# Altium PCB PayLoad Subsystem_AVR.PcbDoc
Units mil, origin at the board's own origin, x right, y up, seen from the top; angles counter-clockwise.
Board outline 3757.87 x 3555.12 mil, 4 copper layers (Top Layer, Ground, Power, Bottom Layer), stack 64.6 mil thick; 26 components, 28 nets, 176 pads, 0 vias.
Unrouted connection lines stored in the file: 61.
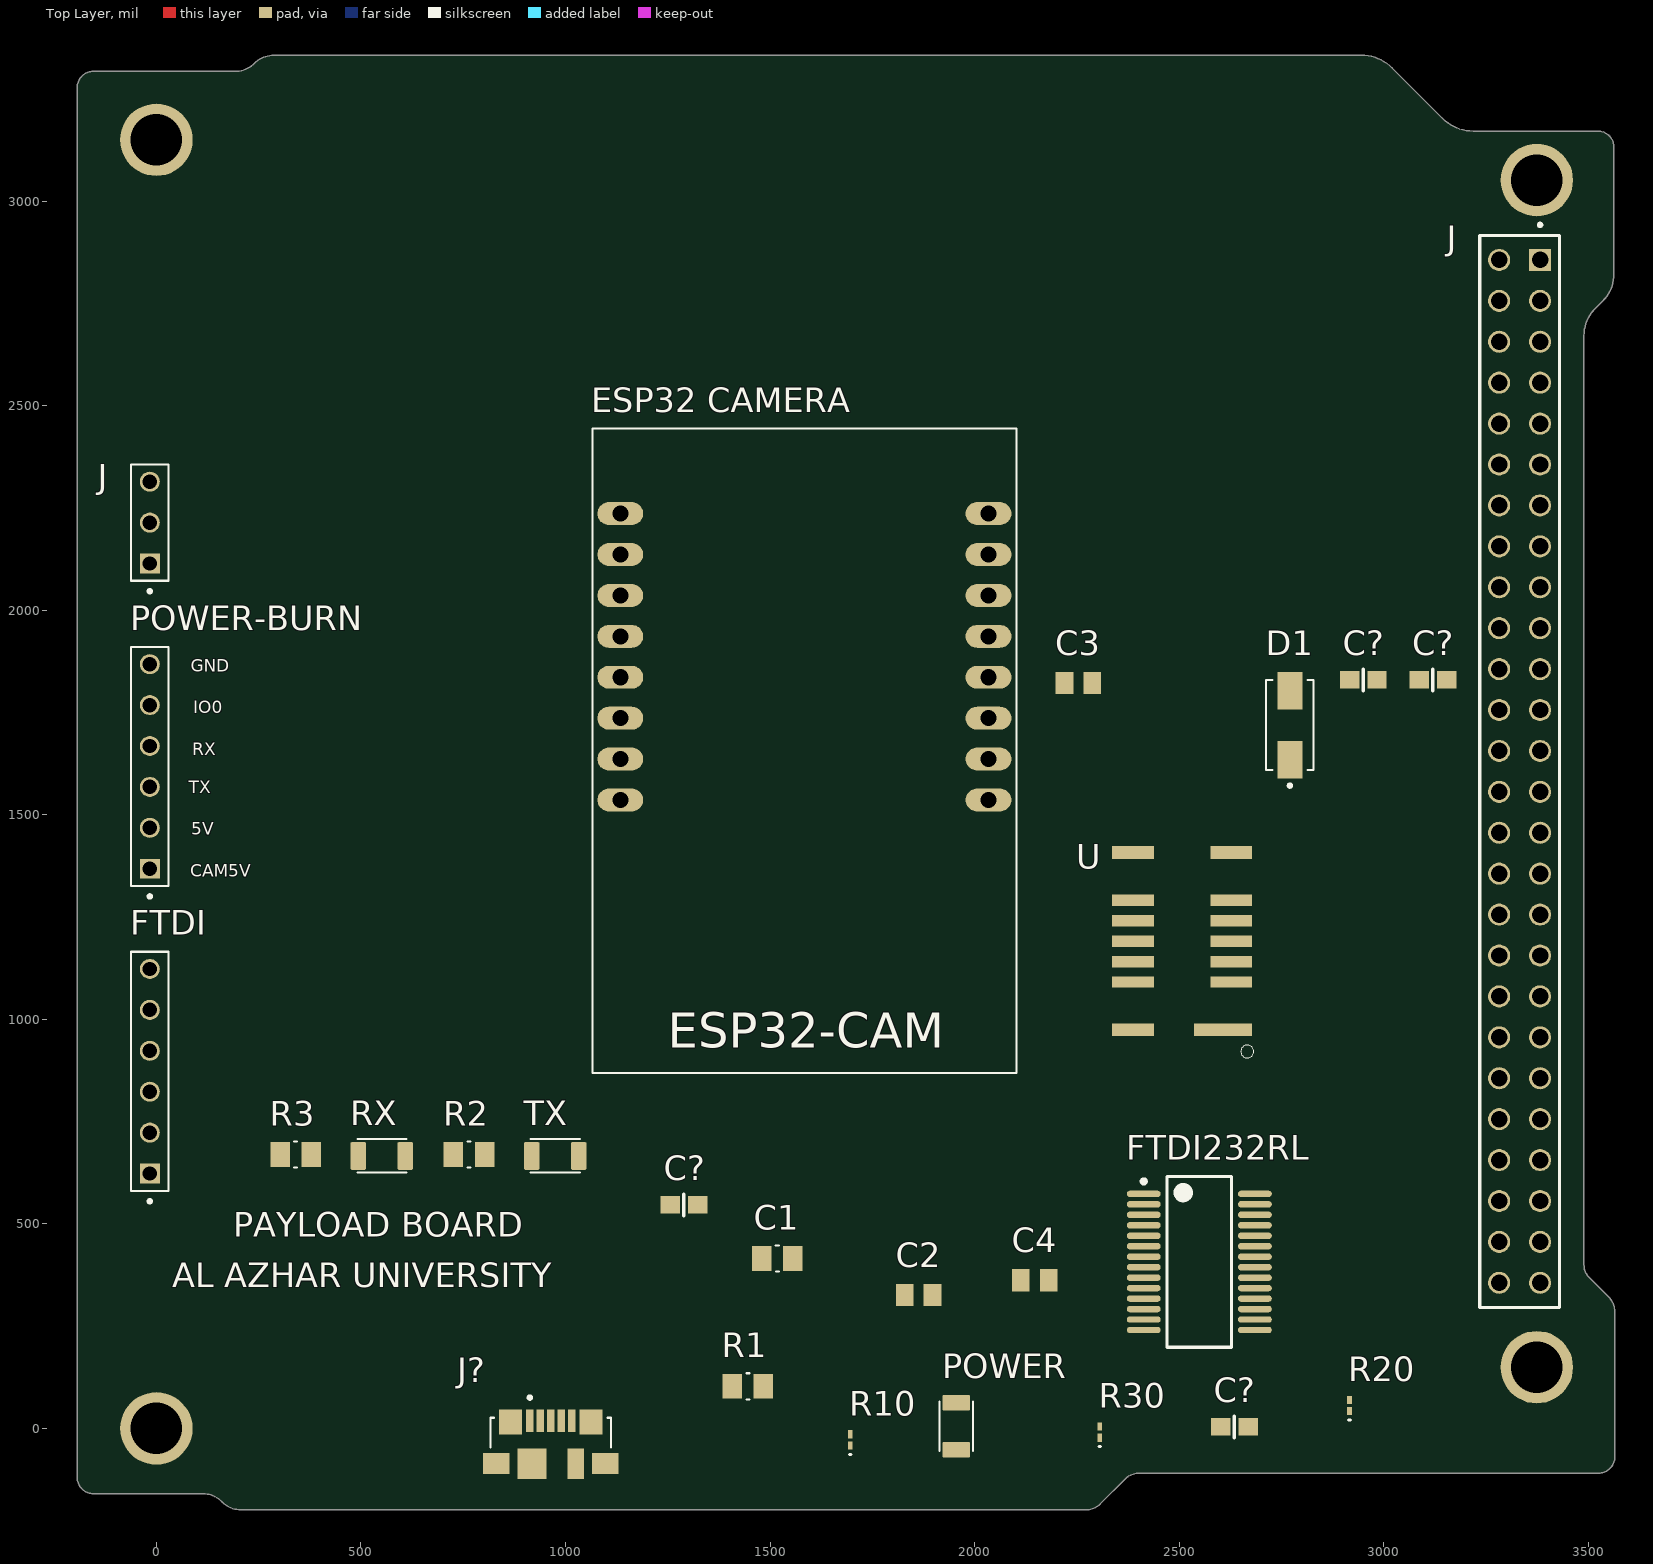
[diagram p0: Top Layer view]
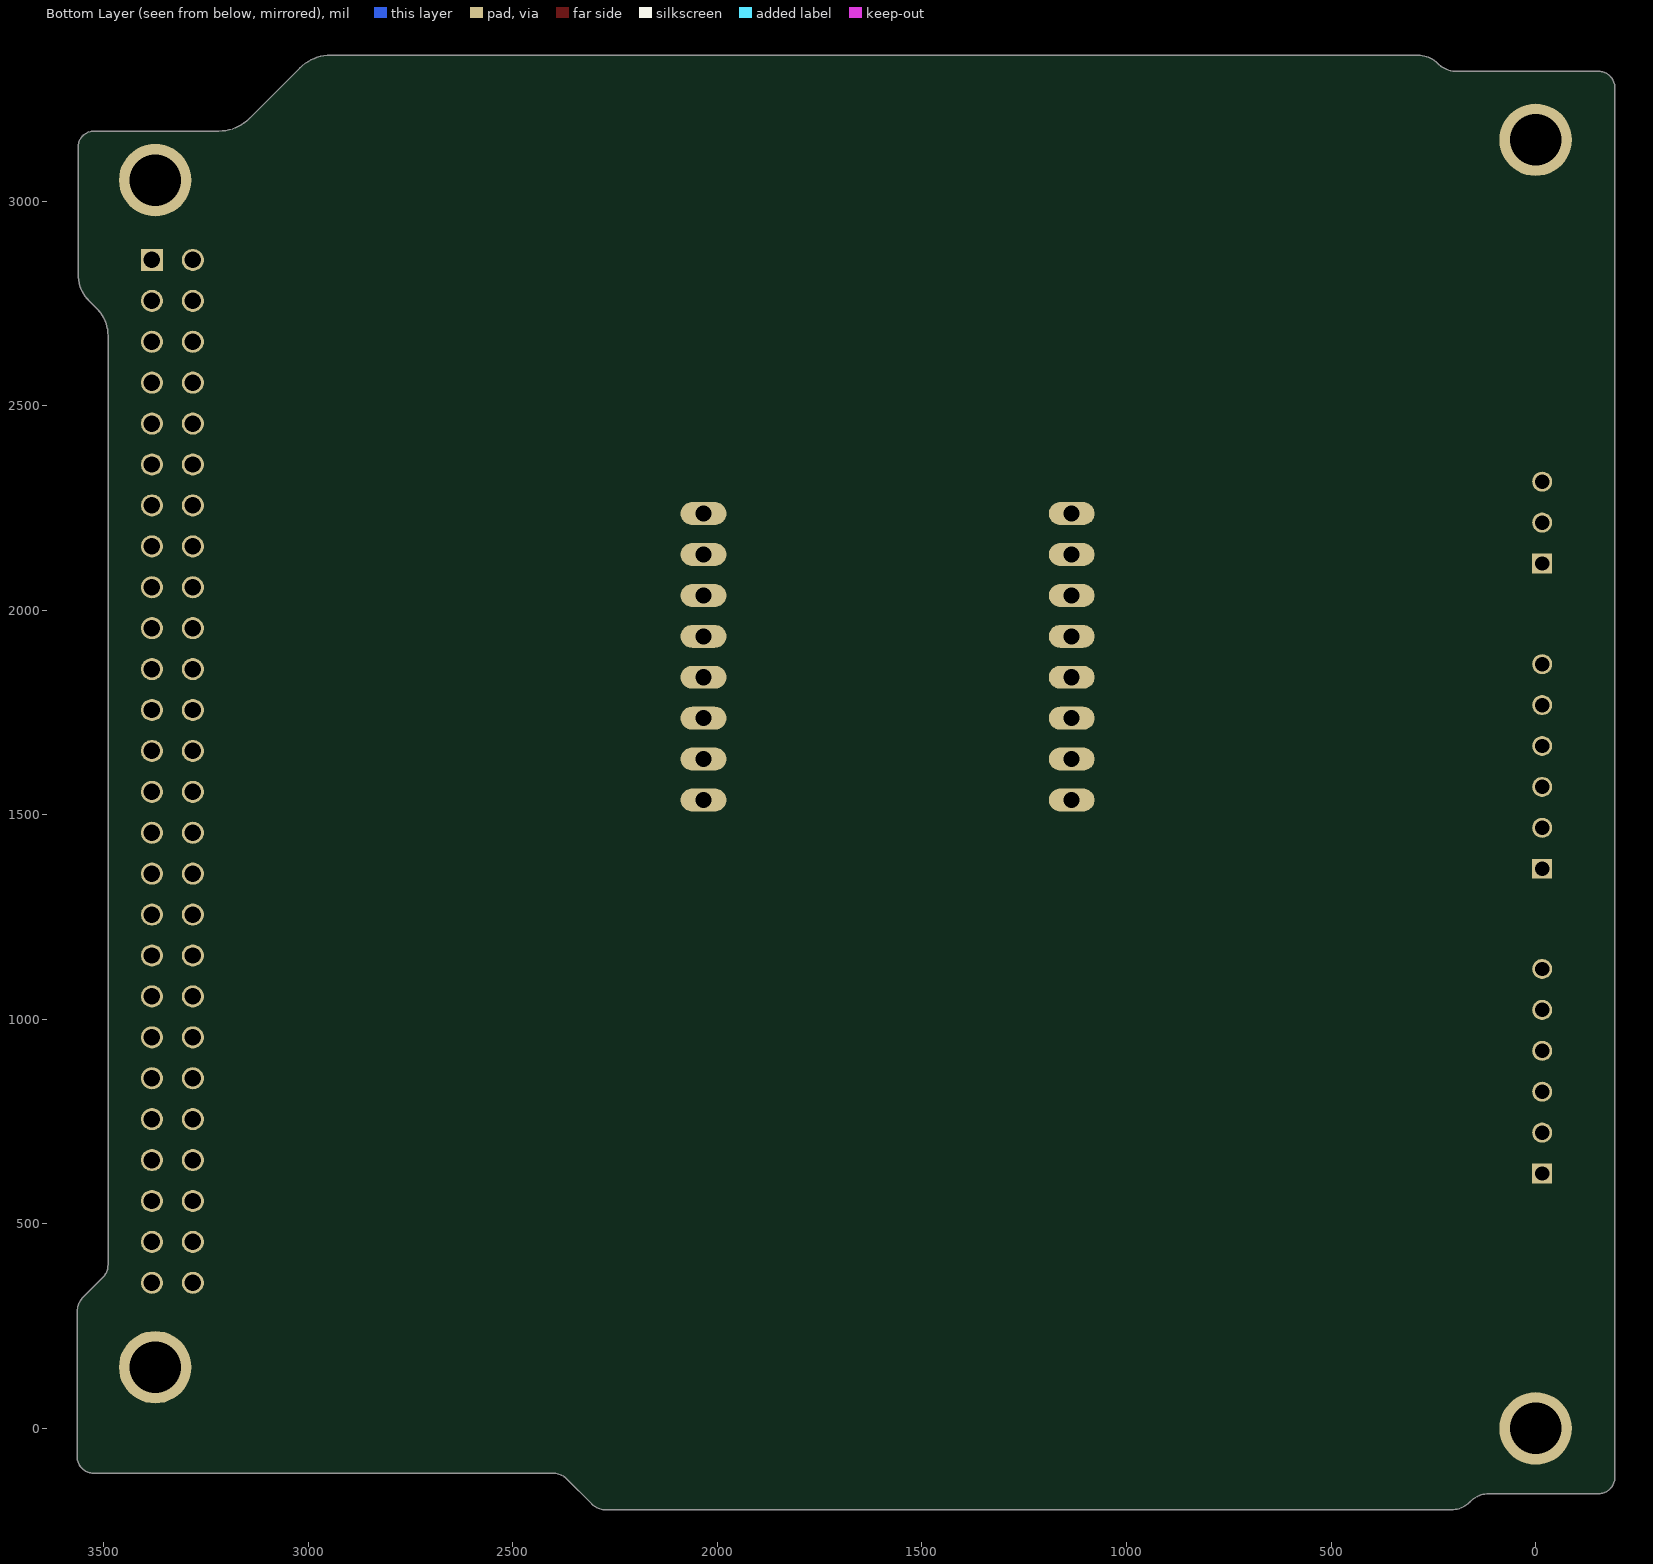
[diagram p1: Bottom Layer view, seen from below]
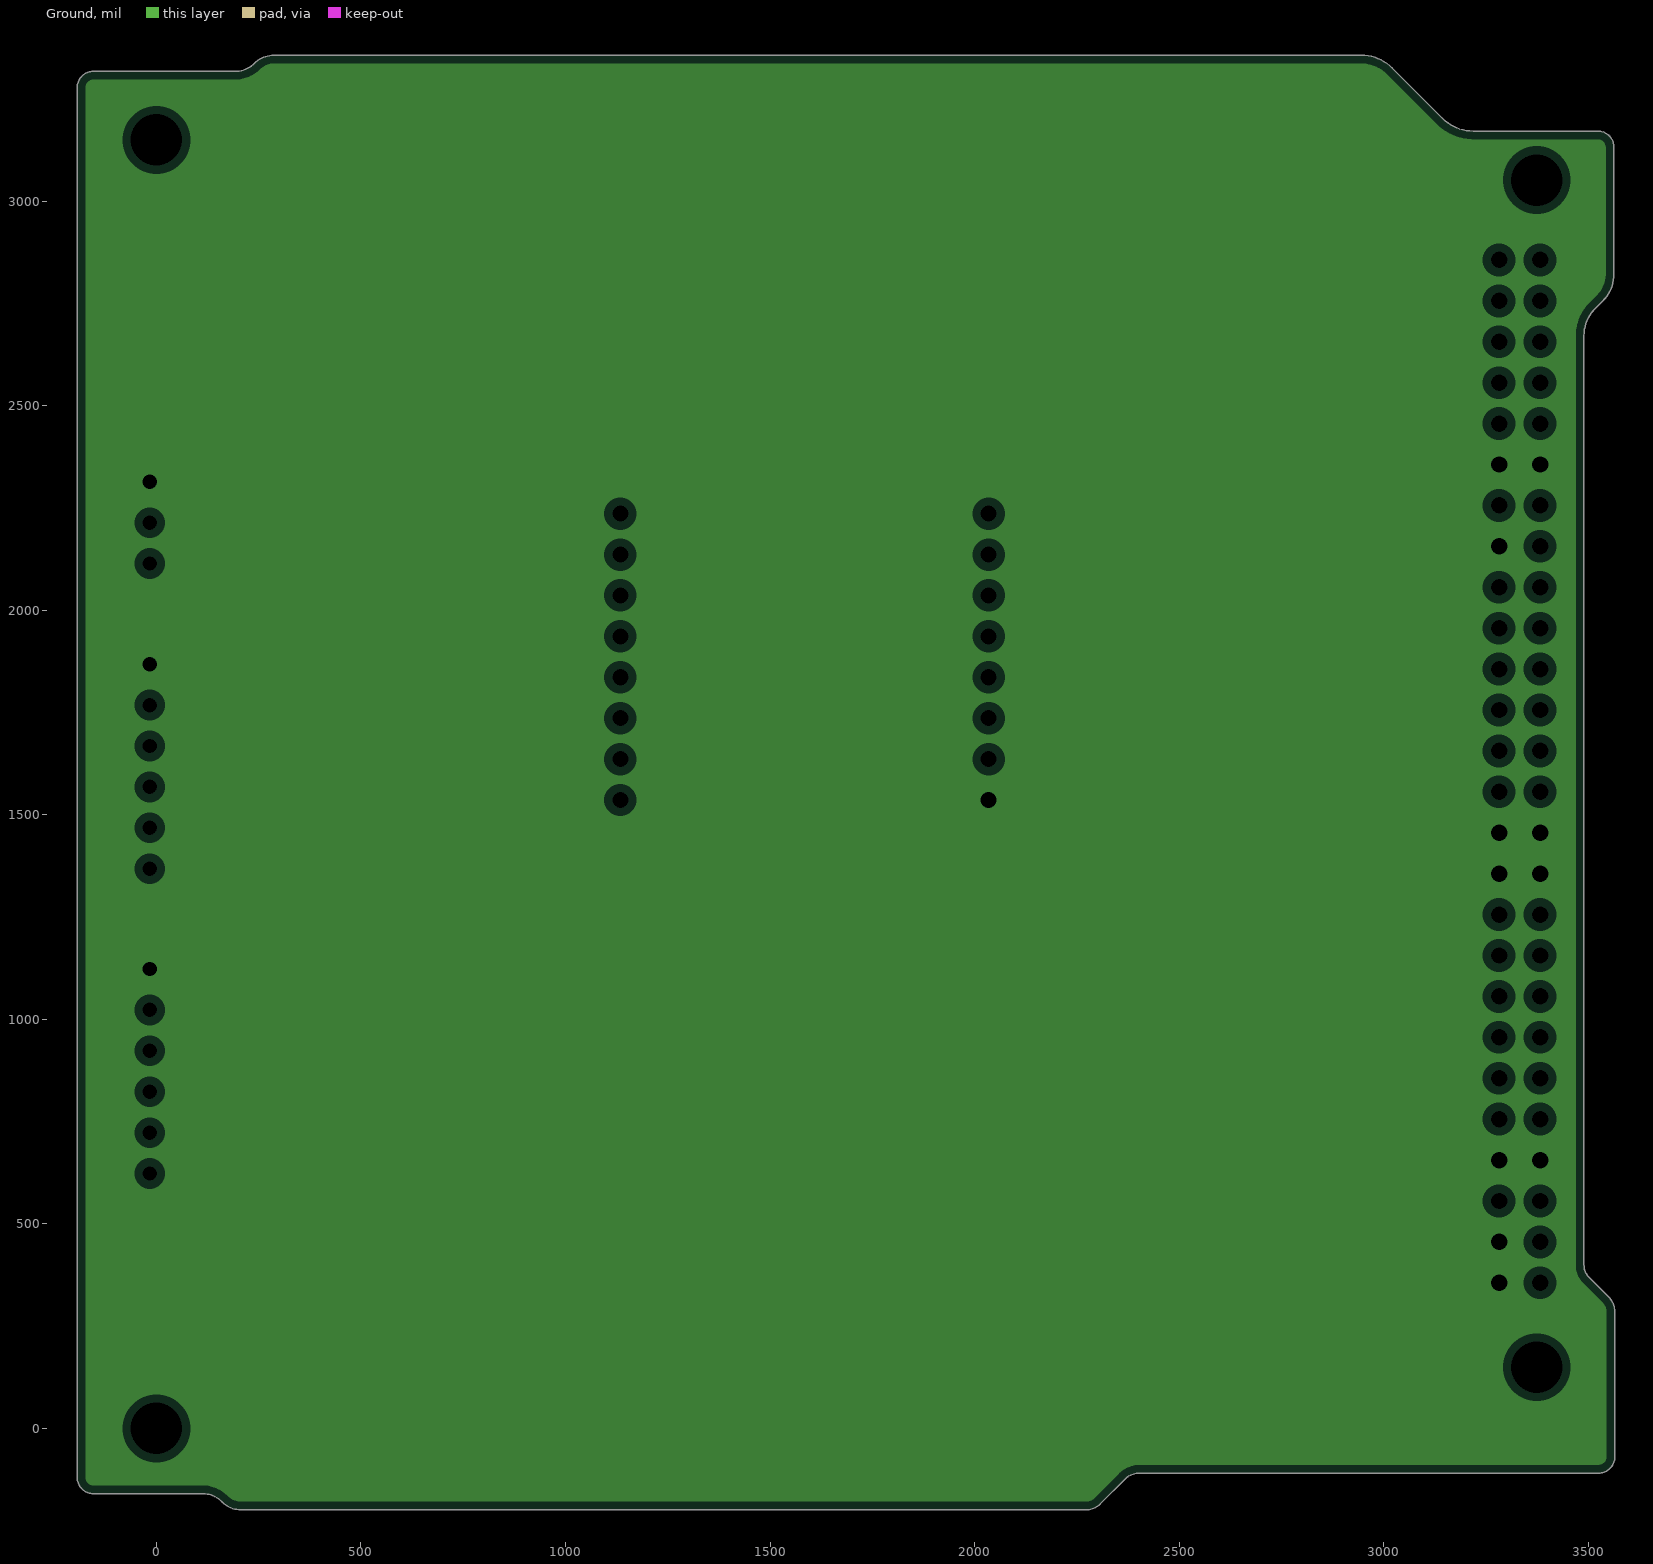
[diagram p2: Ground, clearances drawn from the general rule]
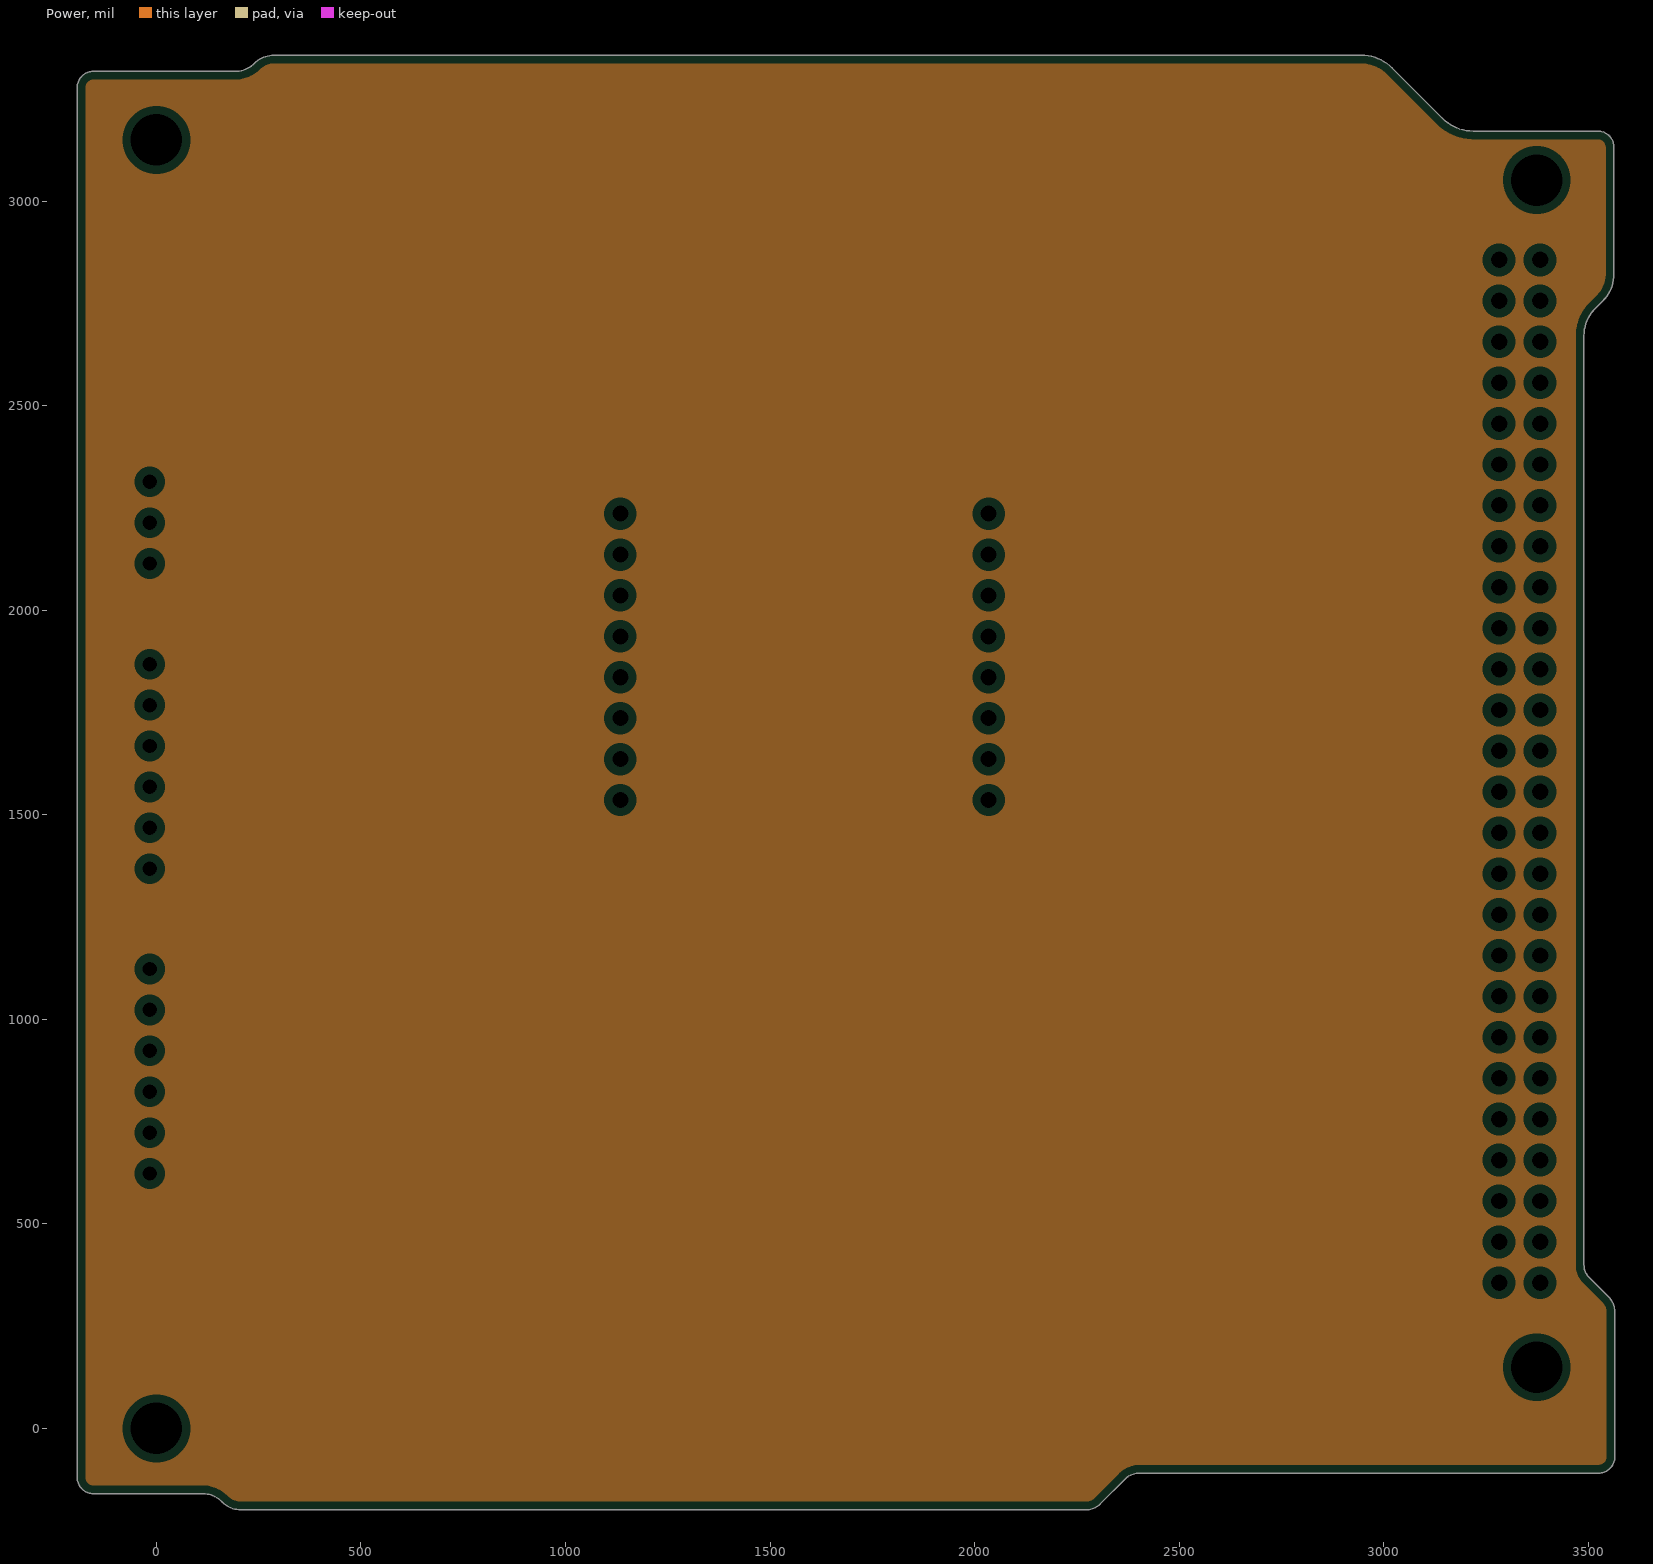
[diagram p3: Power, clearances drawn from the general rule]

## Layer stack, top to bottom
Top Solder: solder mask 0.4, Solder Resist, Dk 3.5
Top Layer: signal copper 1.4
Dielectric 1: prepreg 6.7, FR-4, Dk 4.35
Ground: plane copper 0.7, net G
Dielectric 3: core 47, FR-4, Dk 4.35
Power: plane copper 0.7
Dielectric 2: prepreg 6.7, FR-4, Dk 4.35
Bottom Layer: signal copper 1.4
Bottom Solder: solder mask 0.4, Solder Resist, Dk 3.5

## Board outline
114.17,-159.45 cw(c114.17,-223.13) 159.2,-178.1 161.27,-180.17 ccw(c206.3,-135.14) 206.3,-198.82 2272.83,-198.82 ccw(c2272.83,-150.82) 2306.78,-184.76 2368.42,-123.11 cw(c2402.36,-157.05) 2402.36,-109.06 3525.2,-109.06 ccw(c3525.2,-69.68) 3564.57,-69.68 3564.57,285.43 ccw(c3513.72,285.43) 3549.67,321.39 3528.54,342.52 3502.04,369.03 cw(c3532.62,399.61) 3489.37,399.61 3489.37,2671.26 cw(c3582.52,2671.26) 3516.65,2737.12 3535.32,2755.79 ccw(c3469.45,2821.65) 3562.6,2821.65 3562.6,3131.5 ccw(c3523.23,3131.5) 3523.23,3170.87 3218.5,3170.87 cw(c3218.5,3276.37) 3143.9,3201.77 3020.27,3325.4 ccw(c2945.67,3250.8) 2945.67,3356.3 287.48,3356.3 ccw(c287.48,3289.09) 239.96,3336.61 cw(c192.44,3384.14) 192.44,3316.93 -153.94,3316.93 ccw(c-153.94,3277.56) -193.31,3277.56 -193.31,-120.08 ccw(c-153.94,-120.08) -153.94,-159.45

## Design rules (kind name [scope] priority, off if disabled: settings)
Clearance [All] p1: gap=7 ignorepadtopadclearanceinfootprint=FALSE except(0: Arc-Hole Track-Hole SMDPad-Hole THPad-Hole Via-Hole Fill-Hole Poly-Hole Region-Hole Text-Hole)
ComponentClearance [All] p1: gap=30 collisioncheckmode=3 verticalgap=30 showdistances=FALSE
DiffPairsRouting [All] p1: maxlimit=10 minlimit=10 mostfreqgap=10 toplayer_minwidth=15 toplayer_maxwidth=15 toplayer_prefwidth=15 bottomlayer_minwidth=15 bottomlayer_maxwidth=15 bottomlayer_prefwidth=15 substack1={0761D619-B0FF-4D42-81BD-1B94FE1A46B2} toplayer_{0761d619-b0ff-4d42-81bd-1b94fe1a46b2}_minwidth=15 toplayer_{0761d619-b0ff-4d42-81bd-1b94fe1a46b2}_maxwidth=15 toplayer_{0761d619-b0ff-4d42-81bd-1b94fe1a46b2}_prefwidth=15 bottomlayer_{0761d619-b0ff-4d42-81bd-1b94fe1a46b2}_minwidth=15 bottomlayer_{0761d619-b0ff-4d42-81bd-1b94fe1a46b2}_maxwidth=15 bottomlayer_{0761d619-b0ff-4d42-81bd-1b94fe1a46b2}_prefwidth=15 maxuncoupledlength=500
HoleSize [All] p1: absolutevalues=TRUE maxlimit=130 minlimit=1 maxpercent=80.000 minpercent=20.000
MinimumSolderMaskSliver [All] p1: minsoldermaskwidth=3
PlaneClearance [All] p1: clearance=20
PlaneConnect [All] p1: planeconnectstyle=Relief reliefexpansion=20 reliefentries=4 reliefconductorwidth=10 reliefairgap=10
PolygonConnect [All] p1: connectstyle=Relief reliefconductorwidth=10 reliefentries=4 polygonreliefangle="90 Angle" airgapwidth=10
RoutingVias [All] p1: holewidth=12 width=24 viastyle="Through Hole" minholewidth=10 minwidth=10 maxholewidth=12 maxwidth=24
SilkToSilkClearance [All] p1: silktosilkclearance=4
SilkToSolderMaskClearance [IsText] p1: minsilkscreentomaskgap=4 clearancetoexposedcopper=TRUE
SolderMaskExpansion [All] p1: expansion=3 istentingtop=FALSE
Width [All] p1: maxlimit=40 minlimit=10 preferedwidth=12 substack1={0761D619-B0FF-4D42-81BD-1B94FE1A46B2} toplayer_{0761d619-b0ff-4d42-81bd-1b94fe1a46b2}_minwidth=7 bottomlayer_{0761d619-b0ff-4d42-81bd-1b94fe1a46b2}_minwidth=7 minimp=50.000000 maximp=50.000000 favimp=50.000000
22 further rules are at their usual default settings.

## Classes and differential pairs
component class "PayLoad Subsystem_AVR": C1 C2 C3 C4 C? D1 "ESP32 CAM" "ESP32 CAMERA" FTDI FTDI232RL J J? POWER POWER-BURN R1 R2 R3 R10 R20 R30 RX TX U

## Components (designator, comment, footprint, x,y, rotation, side; value= is the part's Value field where it differs from the comment)
C1 "(1206) 10uF" CAPC3216X125N0 1516.98,417 r0 top
C2 "(0805) 100nF" CAPC2012X95N-0 1863,326 r0 top
C3 "(0805) 10nF" CAPC2012X95N-0 2253.69,1822.18 r0 top
C4 "(0805) 100nF" CAPC2012X95N-0 2147,362 r0 top
C? "Cap_CER_1U_10V_0603" "0603 - cap" 2601.69,4.18 r0 top
C? "Cap_CER_1U_10V_0603" "0603 - cap" 1256,547 r0 top
C? "Cap_CER_1U_10V_0603" "0603 - cap" 3086.69,1830.18 r0 top
C? "Cap_CER_1U_10V_0603" "0603 - cap" 2916.69,1830.18 r0 top
D1 "SMD Schottky diode 5A/40V" DIOM5227X270N 2770.69,1719.18 r90 top
"ESP32 CAMERA" "ESP32-CAM" ESP32-CAM 1584,1836 r0 top
FTDI "6 Position PinHeader 1Row" TE_6-146285-6 -16,623 r90 top
FTDI232RL "IC_FT232RL" SSOP-28 2549.17,406.98 r0 top
J "3 Position PinHeader 1Row" TE_3-103327-3 -16,2114 r90 top
J "52 Position Elevated Socket Connector" SAMTEC_ESQ-126-39-G-D 3382.01,2855.98 r90 top locked
J? "USB Connectors MICRO USB B" MOLEX_47346-0001 963.98,-86 r0 top
POWER "(1206) Blue" RESC3015X65-01 1955,6 r90 top
POWER-BURN "6 Position PinHeader 1Row" TE_6-146285-6 -16,1368 r90 top
R1 "(1206) 85" CAPC3216X125N0 1445,105 r0 top
R2 "(1206) 150" CAPC3216X125N0 763.69,671.18 r0 top
R3 "(1206) 150" CAPC3216X125N0 339.69,671.18 r0 top
R10 "RES_0_0.1W_0603" 0603 1696,-28 r90 top
R20 "RES_0_0.1W_0603" 0603 2916,56 r90 top
R30 "RES_0_0.1W_0603" 0603 2306,-9 r90 top
RX "(1206) Yellow" RESC3015X65-01 551.69,666.18 r0 top
TX "(1206) Green" RESC3015X65-01 975.69,666.18 r0 top
U "Infrared camera AMG8833" XDCR_AMG8833 2507.08,1191 r90 top

## Footprints (in the part's own frame and the unit in brackets; to place one, negate y for a bottom-side part, rotate by r counter-clockwise, add the part's x,y. Pads: shape width x height; smd on the part's side, far side on the other; paste and mask are expansions set on the pad)
0603 [mm]
  rect 0.5x0.3 smd: 1(-0.35,0) 2(0.35,0)
  silkscreen extent -0.9,-0.05 -0.9,0.05, body extent -0.33,-0.18 0.33,0.18, height 0.55
"0603 - cap" [mm]
  rect 1.2x1.1 smd: 1(0,0) 2(1.7,0)
  silkscreen extent 0.84,-0.69 0.84,0.66, body extent 0.04,-0.43 1.64,0.37, height 0.8
CAPC2012X95N-0 [mm]
  rect 1.1x1.38 smd: 1(-0.863,0) 2(0.863,0)
  body extent -1.6,-0.8 1.6,0.8, height 1.2
CAPC3216X125N0 [mm]
  rect 1.21x1.55 smd: 1(-0.95,-0.047) 2(0.987,-0.047)
  silkscreen extent -0.08,-0.86 0.12,0.76, body extent -1.58,-0.84 1.62,0.76, height 1.25
DIOM5227X270N [mm]
  rect 2.33x1.56 smd: A(2.14,0) C(-2.14,0)
  silkscreen extent -3.85,-1.48 2.8,1.48, body extent -2.6,-1.36 2.6,1.36, height 2.7
ESP32-CAM [mil]
  oval 112x56 hole 39.37: P$1(-450,400) P$2(-450,300) P$3(-450,200) P$4(-450,100) P$5(-450,0) P$6(-450,-100) P$7(-450,-200) P$8(-450,-300) P$9(450,-300) P$10(450,-200) P$11(450,-100) P$12(450,0) P$13(450,100) P$14(450,200) P$15(450,300) P$16(450,400)
  silkscreen extent -518,-967 518,607, body extent -531,-918 531,618, height 315
MOLEX_47346-0001 [mm]
  rect 0.45x1.38 smd: 1(-1.3,2.66) 2(-0.65,2.66) 3(0,2.66) 4(0.65,2.66) 5(1.3,2.66)
  rect 1.425x1.55 smd: S1(-2.488,2.575) S2(2.488,2.575)
  rect 1.65x1.3 smd: S3(-3.375,0) S6(3.375,0)
  rect 1.8x1.9 smd: S4(-1.15,0)
  rect 1x1.9 smd: S5(1.55,0)
  silkscreen extent -3.75,1 3.75,4.2, body extent -4.18,-2.54 4.18,2.89, height 2.62
RESC3015X65-01 [mm]
  rrect20% 0.98x1.72 smd: 1(-1.479,-0.004) 2(1.441,-0.004)
  silkscreen extent -1.54,-1.04 1.52,1.04, body extent -1.63,-0.8 1.57,0.8, height 1.1
SAMTEC_ESQ-126-39-G-D [mm]
  rect 1.37x1.37 hole 1.02: 01(0,0)
  round 1.37 hole 1.02: 02(0,2.54) 03(-2.54,0) 04(-2.54,2.54) 05(-5.08,0) 06(-5.08,2.54) 07(-7.62,0) 08(-7.62,2.54) 09(-10.16,0) 10(-10.16,2.54) 11(-12.7,0) 12(-12.7,2.54) 13(-15.24,0) 14(-15.24,2.54) 15(-17.78,0) 16(-17.78,2.54) 17(-20.32,0) 18(-20.32,2.54) 19(-22.86,0) 20(-22.86,2.54) 21(-25.4,0) 22(-25.4,2.54) 23(-27.94,0) 24(-27.94,2.54) 25(-30.48,0) 26(-30.48,2.54) 27(-33.02,0) 28(-33.02,2.54) 29(-35.56,0) 30(-35.56,2.54) 31(-38.1,0) 32(-38.1,2.54) 33(-40.64,0) 34(-40.64,2.54) 35(-43.18,0) 36(-43.18,2.54) 37(-45.72,0) 38(-45.72,2.54) 39(-48.26,0) 40(-48.26,2.54) 41(-50.8,0) 42(-50.8,2.54) 43(-53.34,0) 44(-53.34,2.54) 45(-55.88,0) 46(-55.88,2.54) 47(-58.42,0) 48(-58.42,2.54) 49(-60.96,0) 50(-60.96,2.54) 51(-63.5,0) 52(-63.5,2.54)
  silkscreen extent -65.03,-1.2 2.27,3.74, body extent -65.15,-1.27 1.4,3.81, height 8.51
SSOP-28 [mm] "28-Pin SSOP 0.65 mm Pitch"
  oval 2.1x0.4 smd: 1(-3.45,4.225) 2(-3.45,3.575) 3(-3.45,2.925) 4(-3.45,2.275) 5(-3.45,1.625) 6(-3.45,0.975) 7(-3.45,0.325) 8(-3.45,-0.325) 9(-3.45,-0.975) 10(-3.45,-1.625) 11(-3.45,-2.275) 12(-3.45,-2.925) 13(-3.45,-3.575) 14(-3.45,-4.225) 15(3.45,-4.225) 16(3.45,-3.575) 17(3.45,-2.925) 18(3.45,-2.275) 19(3.45,-1.625) 20(3.45,-0.975) 21(3.45,-0.325) 22(3.45,0.325) 23(3.45,0.975) 24(3.45,1.625) 25(3.45,2.275) 26(3.45,2.925) 27(3.45,3.575) 28(3.45,4.225)
  silkscreen extent -3.57,-5.3 2,5.3, body extent -2.7,-5.3 2.7,5.3, height 2
TE_3-103327-3 [mm]
  rect 1.24x1.24 hole 0.89: 1(0,0)
  round 1.24 hole 0.89: 2(2.54,0) 3(5.08,0)
  silkscreen extent -1.82,-1.17 6.15,1.17, body extent -1.31,-1.2 6.31,1.21, height 8.18
TE_6-146285-6 [mm]
  rect 1.24x1.24 hole 0.89: 1(0,0)
  round 1.24 hole 0.89: 2(2.54,0) 3(5.08,0) 4(7.62,0) 5(10.16,0) 6(12.7,0)
  silkscreen extent -1.82,-1.17 13.77,1.17, body extent -1.07,-1.14 13.77,1.14, height 8.1
XDCR_AMG8833 [mm]
  rect 0.8x3.6 smd: 1(-5.5,-2.55)
  rect 0.7x2.6 smd: 2(-2.54,-3.05) 3(-1.27,-3.05) 4(0,-3.05) 5(1.27,-3.05) 6(2.54,-3.05) 9(2.54,3.05) 10(1.27,3.05) 11(0,3.05) 12(-1.27,3.05) 13(-2.54,3.05)
  rect 0.8x2.6 smd: 7(5.5,-3.05) 8(5.5,3.05) 14(-5.5,3.05)
  silkscreen extent -7.25,-4.45 -6.45,-3.65, body extent -5.8,-4 5.8,4, height 4.3

## Part data
C1: library part "Capacitor 1206", "UMF316B7103KFHT/1206 Capacitor", Package=None, Availability=Unavailable, MP=UMF316B7103KFHT, Price=None
C2 C3 C4: library part "Capacitor 0805", "UMK212SD103KD-T/CAP CER 10000PF 50V 0805", Package=None, Availability=Unavailable, MP=UMK212SD103KD-T, Price=None
C?: library part "Capacitor 0603", "Capacitor", Capacitance=1µF, Manufacturer="Taiyo Yuden", Manufacturer Part Number=LMK107B7105KA-T, Operating Temperature="-55°C ~ 125°C", Package / Case="0603 (1608 Metric)", Ratings=-, Supplier Part Number 1=587-1242-1-ND, Temperature Coefficient=X7R, Tolerance=±10%, Voltage - Rated=10V, Applications="General Purpose", Category=Capacitors, ComponentLink1Description=http://ds.yuden.co.jp/TYCOMPAS/ut/detail.do?productNo=LMK107B7105KA-T&fileName=LMK107B7105KA-T_SS&mode=specSheetDownload, ComponentLink1URL=http://ds.yuden.co.jp/TYCOMPAS/ut/detail.do?productNo=LMK107B7105KA-T&fileName=LMK107B7105KA-T_SS&mode=specSheetDownload, Features=-, Height - Seated (Max)=-, Lead Spacing=-, Lead Style=-, Mounting Type="Surface Mount, MLCC", Packaging="Cut Tape (CT)", Part Status=Active, Pricing 1="1=0.1, 10=0.042, 25=0.0308, 50=0.023, 100=0.0188, 250=0.01576, 500=0.01344, 1000=0.01056 (USD)", RoHS="RoHS Compliant", Size / Dimension="0.063\" L x 0.031\" W (1.60mm x 0.80mm)", Stock 1=600713, Supplier 1=Digi-Key, Thickness (Max)="0.035\" (0.90mm)"
C?: library part "Capacitor 0603", "Capacitor", Capacitance=2.2µF, Manufacturer="Taiyo Yuden", Manufacturer Part Number=LMK107B7105KA-T, Operating Temperature="-55°C ~ 125°C", Package / Case="0603 (1608 Metric)", Ratings=-, Supplier Part Number 1=587-1242-1-ND, Temperature Coefficient=X7R, Tolerance=±10%, Voltage - Rated=10V, Applications="General Purpose", Category=Capacitors, ComponentLink1Description=http://ds.yuden.co.jp/TYCOMPAS/ut/detail.do?productNo=LMK107B7105KA-T&fileName=LMK107B7105KA-T_SS&mode=specSheetDownload, ComponentLink1URL=http://ds.yuden.co.jp/TYCOMPAS/ut/detail.do?productNo=LMK107B7105KA-T&fileName=LMK107B7105KA-T_SS&mode=specSheetDownload, Features=-, Height - Seated (Max)=-, Lead Spacing=-, Lead Style=-, Mounting Type="Surface Mount, MLCC", Packaging="Cut Tape (CT)", Part Status=Active, Pricing 1="1=0.1, 10=0.042, 25=0.0308, 50=0.023, 100=0.0188, 250=0.01576, 500=0.01344, 1000=0.01056 (USD)", RoHS="RoHS Compliant", Size / Dimension="0.063\" L x 0.031\" W (1.60mm x 0.80mm)", Stock 1=600713, Supplier 1=Digi-Key, Thickness (Max)="0.035\" (0.90mm)"
C?: library part "Capacitor 0603", "Capacitor", Capacitance=100nF, Manufacturer="Taiyo Yuden", Manufacturer Part Number=LMK107B7105KA-T, Operating Temperature="-55°C ~ 125°C", Package / Case="0603 (1608 Metric)", Ratings=-, Supplier Part Number 1=587-1242-1-ND, Temperature Coefficient=X7R, Tolerance=±10%, Voltage - Rated=10V, Applications="General Purpose", Category=Capacitors, ComponentLink1Description=http://ds.yuden.co.jp/TYCOMPAS/ut/detail.do?productNo=LMK107B7105KA-T&fileName=LMK107B7105KA-T_SS&mode=specSheetDownload, ComponentLink1URL=http://ds.yuden.co.jp/TYCOMPAS/ut/detail.do?productNo=LMK107B7105KA-T&fileName=LMK107B7105KA-T_SS&mode=specSheetDownload, Features=-, Height - Seated (Max)=-, Lead Spacing=-, Lead Style=-, Mounting Type="Surface Mount, MLCC", Packaging="Cut Tape (CT)", Part Status=Active, Pricing 1="1=0.1, 10=0.042, 25=0.0308, 50=0.023, 100=0.0188, 250=0.01576, 500=0.01344, 1000=0.01056 (USD)", RoHS="RoHS Compliant", Size / Dimension="0.063\" L x 0.031\" W (1.60mm x 0.80mm)", Stock 1=600713, Supplier 1=Digi-Key, Thickness (Max)="0.035\" (0.90mm)"
C?: library part "Capacitor 0603", "Capacitor", Capacitance=10µF, Manufacturer="Taiyo Yuden", Manufacturer Part Number=LMK107B7105KA-T, Operating Temperature="-55°C ~ 125°C", Package / Case="0603 (1608 Metric)", Ratings=-, Supplier Part Number 1=587-1242-1-ND, Temperature Coefficient=X7R, Tolerance=±10%, Voltage - Rated=10V, Applications="General Purpose", Category=Capacitors, ComponentLink1Description=http://ds.yuden.co.jp/TYCOMPAS/ut/detail.do?productNo=LMK107B7105KA-T&fileName=LMK107B7105KA-T_SS&mode=specSheetDownload, ComponentLink1URL=http://ds.yuden.co.jp/TYCOMPAS/ut/detail.do?productNo=LMK107B7105KA-T&fileName=LMK107B7105KA-T_SS&mode=specSheetDownload, Features=-, Height - Seated (Max)=-, Lead Spacing=-, Lead Style=-, Mounting Type="Surface Mount, MLCC", Packaging="Cut Tape (CT)", Part Status=Active, Pricing 1="1=0.1, 10=0.042, 25=0.0308, 50=0.023, 100=0.0188, 250=0.01576, 500=0.01344, 1000=0.01056 (USD)", RoHS="RoHS Compliant", Size / Dimension="0.063\" L x 0.031\" W (1.60mm x 0.80mm)", Stock 1=600713, Supplier 1=Digi-Key, Thickness (Max)="0.035\" (0.90mm)"
D1: "S1 Series 1000 V 1 A 1 uA Surface Mount General Purpose Rectifier - DO-214AC", Package=None, Availability=Unavailable, MP=S1M, Price=None
"ESP32 CAMERA": "The smallest 802.11b/g/n Wi-Fi BT SoC Module", Package=Package, Availability="No availability data", Check_prices=https://www.snapeda.com/parts/ESP32-CAM/AI-Thinker/view-part/5507632/?ref=eda, MF=AI-Thinker, MP=ESP32-CAM, Price=None, SnapEDA_Link=https://www.snapeda.com/parts/ESP32-CAM/AI-Thinker/view-part/5507632/?ref=snap
FTDI POWER-BURN: "Connector Header Through Hole 6 position 0.100 (2.54mm)", Package=None, Digi-Key_Part_Number=A122872-ND, DigiKey-Purchase-URL=https://snapeda.com/shop?store=DigiKey&id=2411669, EU_RoHS_Compliance=Compliant, MF="TE Connectivity", MP=5-146285-6, SnapEDA_Link=https://www.snapeda.com/parts/5-146285-6/TE%20Connectivity%20AMP%20Connectors/view-part/2411669/?ref=snap
FTDI232RL: "FT232R USB UART"
J: "Conn Unshrouded Header HDR 3 POS 2.54mm Solder ST Thru-Hole Carton", Package=None, Availability=Unavailable, EU_RoHS_Compliance=Compliant, MF="TE Connectivity", MP=4-103327-5, Price=None, SnapEDA_Link=https://www.snapeda.com/parts/4-103327-5/TE%20Connectivity%20AMP%20Connectors/view-part/2403997/?ref=snap, TE_purchase_URL=https://www.te.com/usa-en/product-4-103327-5.html?te_bu=Cor&te_type=disp&te_campaign=seda_glo_cor-seda-global-disp-prtnr-fy19-seda-model-bom-cta_sma-317_1&elqCampaignId=32493
J: "ESQ-126-39-G-D/52 Position Elevated Socket Connector Through Hole", Package=None, Availability=Unavailable, MF=Samtec, MP=ESQ-126-39-G-D, Price=None, SnapEDA_Link=https://www.snapeda.com/parts/ESQ-126-39-G-D/Samtec%20Inc./view-part/490181/?ref=snap
J?: "USB Connectors MICRO USB B RECPT BTTM MOUNT ASSY", Package=None, Availability=Warning, Check_prices=https://www.snapeda.com/parts/47346-0001/Molex/view-part/53503/?ref=eda, MF=Molex, MP=47346-0001, Price=None, Purchase-URL=https://pricing.snapeda.com/search/part/47346-0001/?ref=eda, SnapEDA_Link=https://www.snapeda.com/parts/47346-0001/Molex/view-part/53503/?ref=snap
POWER RX TX: library part "LED 1206", "LED SMD 1206 High Quality Forward Voltage: 3.2 V / Brightness: 700 mcd", Emitting Color=Amber, Forward Voltage=2V, Manufacturer="Wurth Elektronik", Manufacturer Part Number=150060AS75003, Operating Temperature max.=100C, Operating Temperature min.=-40C, Chip Technology=AlInGaP, ComponentLink1Description="Manufacturer Link", ComponentLink1URL=http://www.we-online.de, ComponentLink2Description=Datasheet, ComponentLink2URL=https://www.we-online.com/catalog/datasheet/150060AS75003.pdf, Dominant Wavelength=605nm, Height=0.7mm, Length=1.6mm, Luminous Intensity=350mcd, Mounting Technology=SMT, Packaging="Tape and Reel", Peak Wavelength=610nm, Size=0603, Viewing Angle=140°, Width=0.8mm
R1 R2 R3: library part "Resistor 1206"
R10 R20 R30: library part "Resistor 0603", "Resistor", Manufacturer="Samsung Electro-Mechanics America, Inc.", Manufacturer Part Number=RC1608J000CS, Operating Temperature="-55°C ~ 155°C", Package / Case="0603 (1608 Metric)", Power (Watts)="0.1W, 1/10W", Resistance (Ohms)=0.0, Supplier Device Package=0603, Supplier Part Number 1=1276-3510-1-ND, Temperature Coefficient=-, Tolerance=Jumper, Category=Resistors, ComponentLink1Description=http://media.digikey.com/pdf/Data%20Sheets/Samsung%20PDFs/RC_Series_ds.pdf, ComponentLink1URL=http://media.digikey.com/pdf/Data%20Sheets/Samsung%20PDFs/RC_Series_ds.pdf, Composition="Thick Film", Failure Rate=-, Features="Moisture Resistant", Height - Seated (Max)="0.022\" (0.55mm)", Number of Terminations=2, Packaging="Cut Tape (CT)", Part Status=Active, Pricing 1="1=0.1, 10=0.017, 25=0.0124, 50=0.0094, 100=0.0069, 250=0.00528, 500=0.00422, 1000=0.0031 (USD)", RoHS="RoHS Compliant", Size / Dimension="0.063\" L x 0.031\" W (1.60mm x 0.80mm)", Stock 1=498586, Supplier 1=Digi-Key
U: "Temperature Sensor Digital, Infrared _IR_ 14-SMD Module", Package="SMD-14 Panasonic", Availability=Unavailable, MF="Panasonic Electronic", MP=AMG8833, Price=None, SnapEDA_Link=https://www.snapeda.com/parts/AMG8833/Panasonic%20Electronic%20Components/view-part/446696/?ref=snap

## Free pads (board coordinates)
  round 177.17 hole 125.98 unplated: 1(0,0) 2(0,3149.61) 3(3374.01,3051.18) 4(3374.01,149.61)

## Nets (pads, with @x,y where several pads share a name; then routed paths per layer and width w, separated by ;. In a path a pad name is that pad's centre, name@x,y a point inside that pad or via, vN(x,y) a via of type N, cw(c..) or ccw(c..) an arc to the next point about the centre after c; other vN are vias at no path point)
3.3V: J.20
5V: J.10 POWER-BURN.2
9V: J.14
CTS: FTDI232RL.11
DTR: FTDI232RL.2
FTDI3.3V: C4.1 C?.2@2983.62,1830.18 C?.2@3153.62,1830.18 FTDI232RL.17 R10.1 R20.2 U.9 U.13
FTRXD: FTDI232RL.5 FTDI.3
FTTXD: FTDI232RL.1 FTDI.1
G: "ESP32 CAMERA.P$9" C1.1 C2.1 C3.1 C4.2 C?.1@2916.69,1830.18 C?.1@3086.69,1830.18 C?.2@1322.93,547 FTDI232RL.7 FTDI232RL.18 FTDI232RL.21 FTDI232RL.25 FTDI232RL.26 FTDI.6 J.3 J.11 J.12 J.16 J.29 J.30 J.31 J.32 J.45 J.46 J.50 J.52 J?.5 POWER-BURN.6 POWER.2 R30.2 U.6
INT: J.2 U.4
IO0: "ESP32 CAMERA.P$14" FTDI.5 POWER-BURN.5
NC: FTDI232RL.8 FTDI232RL.24
NetC?_1: C?.1@2601.69,4.18 U.10
NetC?_2: C?.2@2668.62,4.18 R30.1
NetJ_1: J.1 R20.1
NetPOWER_1: POWER.1 R1.2
NetR2_2: R2.2 TX.1
NetR3_2: R3.2 RX.1
NetR10_2: R10.2 U.5
RXD1: "ESP32 CAMERA.P$11" FTDI.2 J.36 POWER-BURN.4 RX.2
SCL: U.3
SDA: U.2
TXD1: "ESP32 CAMERA.P$10" FTDI.4 J.38 POWER-BURN.3 TX.2
"USB D+": FTDI232RL.15 J?.3
"USB D-": FTDI232RL.16 J?.2
"USB V": C3.2 D1.A FTDI232RL.4 FTDI232RL.19 FTDI232RL.20 J?.1
VBAT: J.49 J.51
VCC-5V(CAMERA): "ESP32 CAMERA.P$1" C1.2 C2.2 D1.C J.06 POWER-BURN.1 R1.1 R2.1 R3.1
pads on no net: "ESP32 CAMERA.P$2" "ESP32 CAMERA.P$3" "ESP32 CAMERA.P$4" "ESP32 CAMERA.P$5" "ESP32 CAMERA.P$6" "ESP32 CAMERA.P$7" "ESP32 CAMERA.P$8" "ESP32 CAMERA.P$12" "ESP32 CAMERA.P$13" "ESP32 CAMERA.P$15" "ESP32 CAMERA.P$16" C?.1@1256,547 FTDI232RL.3 FTDI232RL.6 FTDI232RL.9 FTDI232RL.10 FTDI232RL.12 FTDI232RL.13 FTDI232RL.14 FTDI232RL.22 FTDI232RL.23 FTDI232RL.27 FTDI232RL.28 J.01 J.02 J.03 J.04 J.05 J.07 J.08 J.09 J.13 J.15 J.17 J.18 J.19 J.21 J.22 J.23 J.24 J.25 J.26 J.27 J.28 J.33 J.34 J.35 J.37 J.39 J.40 J.41 J.42 J.43 J.44 J.47 J.48 J?.4 J?.S1 J?.S2 J?.S3 J?.S4 J?.S5 J?.S6 U.1 U.7 U.8 U.11 U.12 U.14

## Polygon pours and split planes (outlines as drawn)
G on Ground (split plane): 175 vertices, not listed, extent -173.26,-178.78 3544.52,3336.26
no net on Power (split plane): 175 vertices, not listed, extent -173.26,-178.78 3544.52,3336.26

## Silkscreen, mask and mechanical layers (free items; w line width, h text height)
Top Overlay:
  text "GND" at 84,1849 h30
  text "IO0" at 90,1748 h30
  text "RX" at 88,1645 h30
  text "TX" at 79,1552 h30
  text "5V" at 85,1451 h30
  text "CAM5V" at 83,1348 h30
  text "PAYLOAD BOARD" at 188,468 h60
  text "AL AZHAR UNIVERSITY" at 39,345 h60
Mechanical 1:
  lines w10: -193.31,-120.08 ccw(c-153.94,-120.08) -153.94,-159.45 114.17,-159.45 cw(c114.17,-223.13) 159.2,-178.1 161.27,-180.17 ccw(c206.3,-135.14) 206.3,-198.82 2272.83,-198.82 ccw(c2272.83,-150.82) 2306.78,-184.76 2368.42,-123.11 cw(c2402.36,-157.05) 2402.36,-109.06 3525.2,-109.05 ccw(c3525.2,-69.68) 3564.57,-69.68 3564.57,285.43 ccw(c3513.72,285.43) 3549.67,321.39 3528.54,342.52 3502.04,369.03 cw(c3532.62,399.61) 3489.37,399.61 3489.37,2671.26 cw(c3582.52,2671.26) 3516.65,2737.12 3535.32,2755.79 ccw(c3469.45,2821.65) 3562.6,2821.65 3562.6,3131.5 ccw(c3523.23,3131.5) 3523.23,3170.87 3218.5,3170.87 cw(c3218.5,3276.37) 3143.9,3201.77 3020.27,3325.4 ccw(c2945.67,3250.8) 2945.67,3356.3 292.91,3356.3 287.48,3356.3 ccw(c287.48,3289.09) 239.96,3336.61 cw(c192.44,3384.14) 192.44,3316.93 187.01,3316.93 -153.94,3316.93 ccw(c-153.94,3277.56) -193.31,3277.56 -193.31,-120.08

## Text inside footprints (layer, text, board x,y; h text height)
J?: Mechanical 13 "PCB EDGE" at 1141.14,-135.21 h16